# Altium PCB ACH512识别升级仪V1.2_20260608.PcbDoc (part 1 of 6)
Units mil, origin at the board's own origin, x right, y up, seen from the top; angles counter-clockwise.
Board outline 6141.73 x 5401.57 mil, 2 copper layers (Top Layer, Bottom Layer); 157 components, 111 nets, 548 pads, 222 vias.
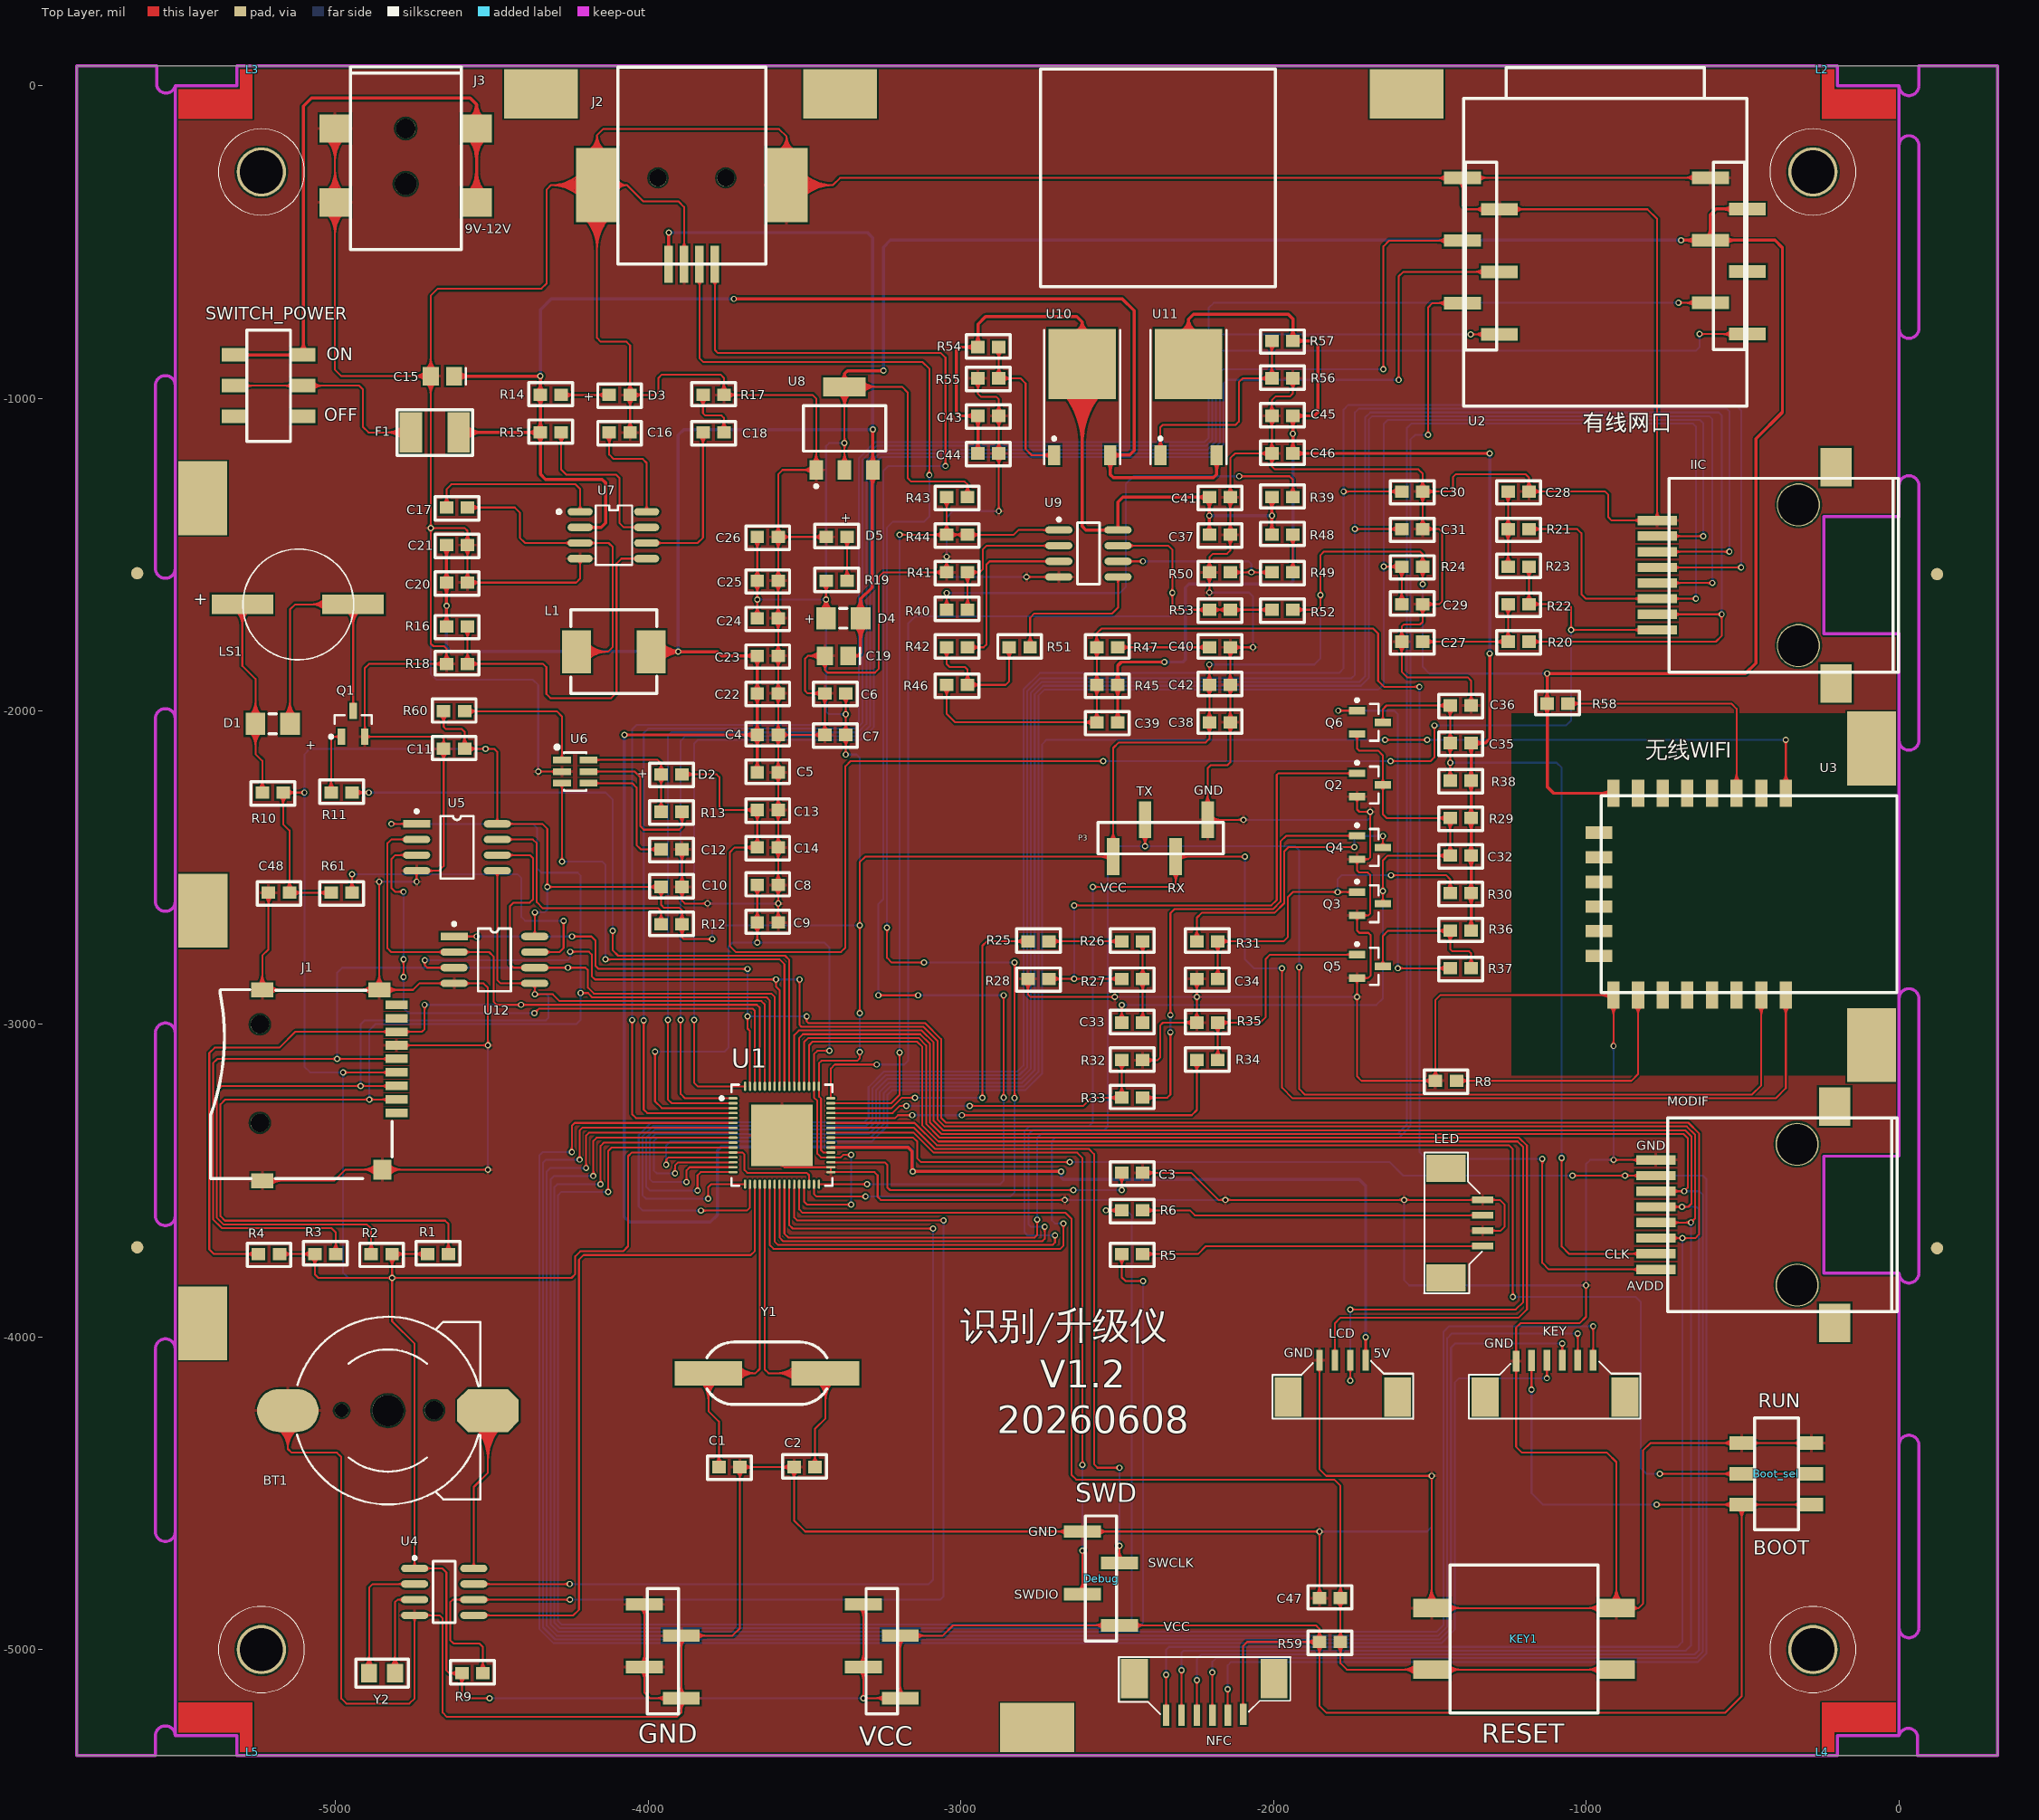
[diagram p0: Top Layer view]
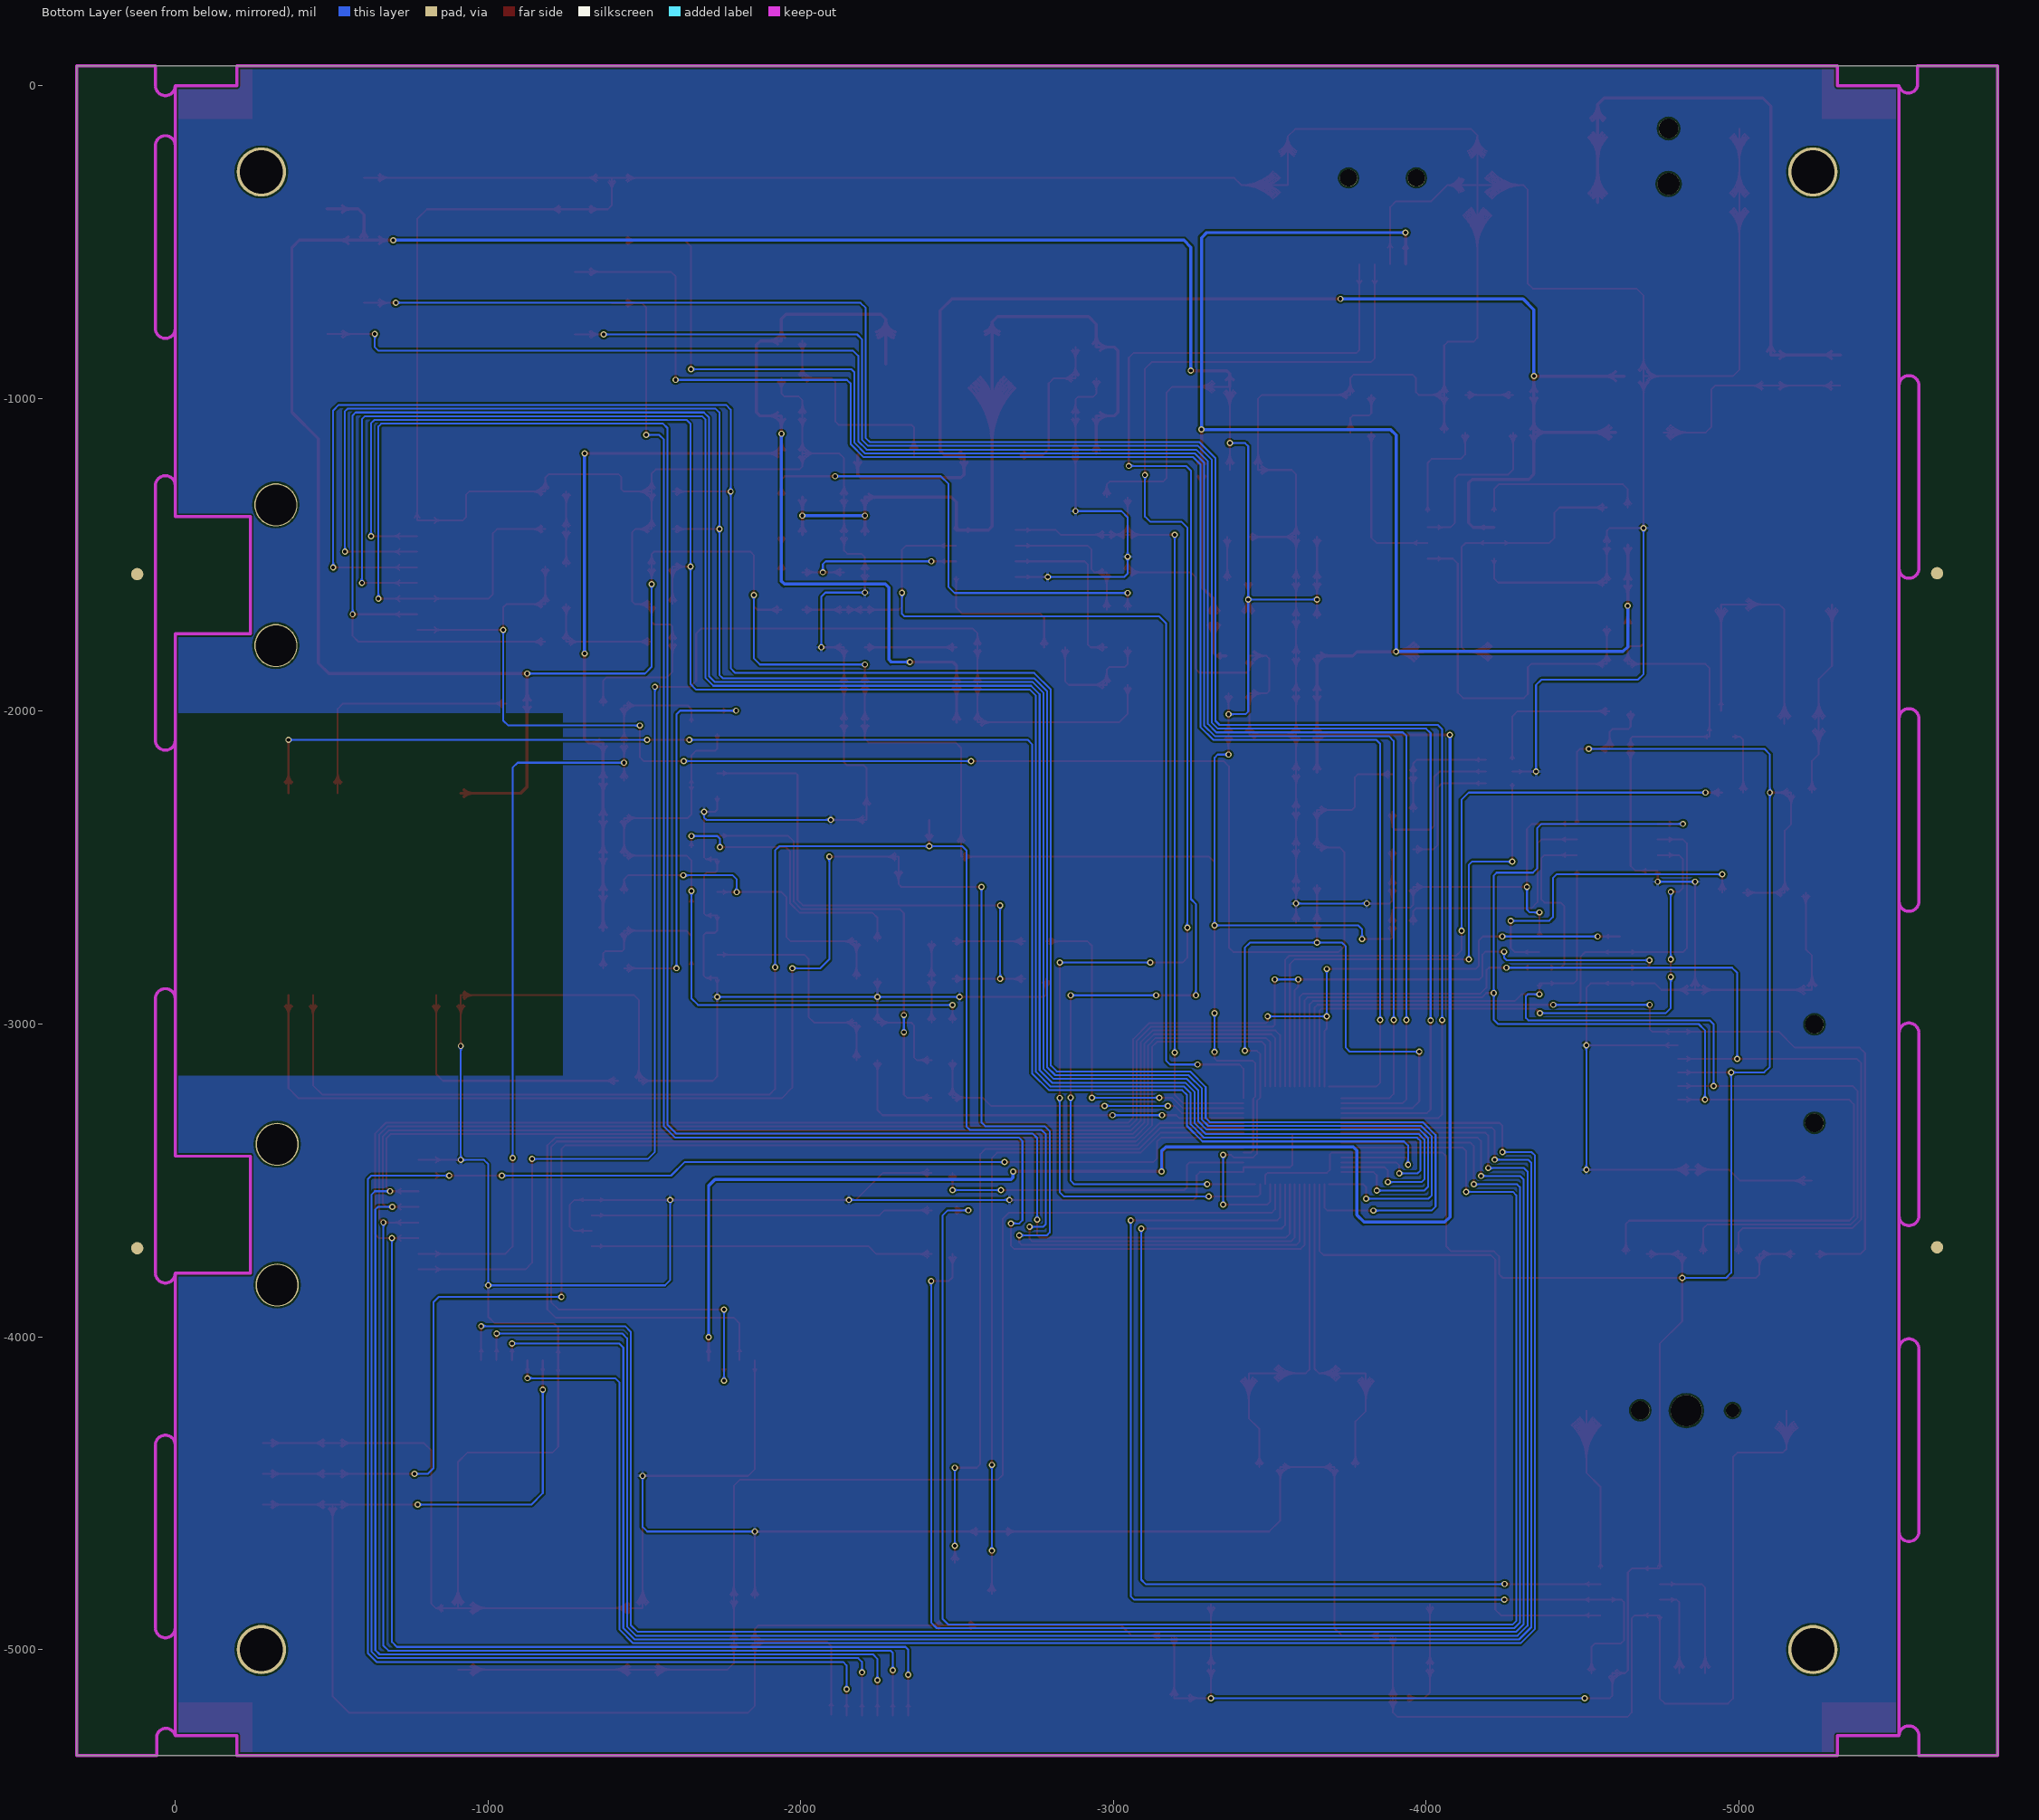
[diagram p1: Bottom Layer view, seen from below]

## Layer stack, top to bottom
Top Layer: signal copper 1.4
Dielectric: dielectric 12.6, FR-4, Dk 4.8
Bottom Layer: signal copper 1.4

## Board outline
-5826.77,62.99 -5826.77,-5338.58 314.96,-5338.58 314.96,62.99 -5826.77,62.99

## Design rules (kind name [scope] priority, off if disabled: settings)
Clearance [All] p1: gap=6
HoleSize [All] p1: absolutevalues=TRUE maxlimit=1000 minlimit=1 maxpercent=80.000 minpercent=20.000
MinimumSolderMaskSliver [All] p1: minsoldermaskwidth=0
PolygonConnect [All] p1: connectstyle=Relief reliefconductorwidth=10 reliefentries=4 polygonreliefangle="90 Angle"
RoutingVias [All] p1: holewidth=11.81 width=19.68 viastyle="Through Hole" minholewidth=11.81 minwidth=19.68 maxholewidth=19.68 maxwidth=31.5
SilkToSilkClearance [All] p1: silktosilkclearance=0
SilkscreenOverComponentPads [All] p1: minsilkscreentomaskgap=0
SolderMaskExpansion [All] p1: expansion=4
Width [All] p1: maxlimit=10 minlimit=6 preferedwidth=6 minimp=50.000000 maximp=50.000000 favimp=50.000000
24 further rules are at their usual default settings.

## Components (designator, comment, footprint, x,y, rotation, side; value= is the part's Value field where it differs from the comment)
Boot_sel "Header 3" 拨码开关 -280.81,-4536.59 r90 top
BT1 "Battery" BAT600 -4511.81,-4235.59 r90 top
C1 "Cap Semi" 0603 -3739.81,-4416.59 r0 top
C2 "Cap Semi" 0603 -3499.81,-4416.59 r180 top
C3 "Cap Semi" 0603 -2451.81,-3475.59 r0 top
C4 "Cap" 0603 -3617.28,-2075.59 r180 top
C5 "Cap" 0603 -3617.28,-2195.59 r180 top
C6 "Cap" 0603 -3401.21,-1942.59 r0 top
C7 "Cap" 0603 -3401.21,-2075.59 r0 top
C8 "Cap" 0603 -3617.28,-2555.59 r180 top
C9 "Cap" 0603 -3617.28,-2675.59 r180 top
C10 "Cap Semi" 0603 -3924.81,-2561.59 r180 top
C11 "Cap" 0603 -4620,-2120 r180 top
C12 "Cap" 0603 -3924.81,-2441.59 r0 top
C13 "Cap" 0603 -3617.28,-2315.59 r0 top
C14 "Cap" 0603 -3617.28,-2435.59 r0 top
C15 "Cap Semi" 0805 -4657.41,-928.59 r180 top
C16 "Cap Semi" 0603 -4090.81,-1108.59 r0 top
C17 "Cap Semi" 0603 -4610.81,-1348.59 r0 top
C18 "Cap Semi" 0603 -3790.81,-1108.59 r0 top
C19 "22uF" 0805 -3397.27,-1822.59 r180 top
C20 "100nF" 0603 -4610.81,-1588.59 r0 top
C21 "100nF" 0603 -4610.81,-1468.59 r0 top
C22 "100nF" 0603 -3617.27,-1942.59 r0 top
C23 "100nF" 0603 -3617.27,-1822.59 r0 top
C24 "Cap Pol1" 0603 -3617.27,-1702.59 r0 top
C25 "Cap Pol1" 0603 -3617.27,-1582.59 r0 top
C26 "Cap Semi" 0603 -3617.27,-1442.59 r0 top
C27 "Cap Semi" 0603 -1556.81,-1777.59 r0 top
C28 "Cap Semi" 0603 -1216.81,-1297.59 r0 top
C29 "Cap Semi" 0603 -1556.81,-1657.59 r180 top
C30 "Cap Semi" 0603 -1556.81,-1297.59 r0 top
C31 "Cap Semi" 0603 -1556.81,-1417.59 r0 top
C32 "Cap Semi" 0603 -1401.81,-2461.59 r0 top
C33 "Cap Semi" 0603 -2451.81,-2995.59 r180 top
C34 "Cap Semi" 0603 -2211.81,-2855.59 r0 top
C35 "Cap Semi" 0603 -1401.81,-2101.59 r0 top
C36 "Cap Semi" 0603 -1401.81,-1981.59 r0 top
C37 "Cap Semi" 0603 -2171.81,-1435.59 r0 top
C38 "Cap Semi" 0603 -2171.81,-2035.59 r180 top
C39 "Cap Semi" 0603 -2531.81,-2035.59 r0 top
C40 "Cap Semi" 0603 -2171.81,-1795.59 r180 top
C41 "Cap Semi" 0603 -2171.81,-1315.59 r0 top
C42 "Cap Semi" 0603 -2171.81,-1915.59 r180 top
C43 "Cap Semi" 0603 -2911.81,-1055.59 r0 top
C44 "Cap Semi" 0603 -2911.81,-1175.59 r0 top
C45 "Cap Semi" 0603 -1971.81,-1055.59 r180 top
C46 "Cap Semi" 0603 -1971.81,-1175.59 r180 top
C47 "Cap Semi" 0603 -1819.81,-4835.59 r180 top
C48 "Cap Semi" 0603 -5180,-2580 r0 top
D1 "1N4148" 3216[1206] -5200,-2040 r180 top
D2 "LRB521S 30TIG" 0603 -3924.81,-2201.59 r0 top
D3 "LED" 0603 -4090.81,-988.59 r0 top
D4 "1N4148" 3216[1206] -3375.62,-1702.59 r0 top
D5 "LED" 0603 -3397.27,-1442.59 r180 top
Debug "Header 7" 4PIN_贴片 -2492.81,-4922.72 r90 top
F1 "可恢复保险丝" FUSE_1812 -4681.81,-1108.59 r0 top
GND "" 4Pin_贴片#1 -4011.81,-4855.59 r270 top
IIC "" RJ45网络插座 -411.81,-1520 r0 top
J1 "Micro SD" MICRO_SD -5084.74,-3192.59 r270 top
J2 "USB" USB_B_型贴片 -3860,-255.59 r270 top
J3 "DC050" DC050_贴片 -4951.81,60 r270 top
KEY "Header 6" 6pin__1.25mm -1161.81,-4445.59 r180 top
KEY1 "SW-PB按键" 12*12_贴片按钮 -1199.24,-4966.02 r180 top
L1 "Inductor" SMTDR75-100M -4110.81,-1811.02 r0 top
L2 "L1" 边框焊锡 -247,52 r180 top
L3 "L1" 边框焊锡2 -5264.81,52 r180 top
L4 "L1" 边框焊锡2 -247,-5327.28 r0 top (schematic designator L3)
L5 "L1" 边框焊锡 -5264.81,-5327.59 r0 top (schematic designator L2)
LCD "Header 4" 4pin_1.25mm -1600,-4055.59 r180 top (schematic designator UARTB_LCD1)
LED "Header 4" 4pin_1.25mm -1311.81,-3815.59 r90 top
LS1 "Speaker" 贴片蜂鸣器 -5120,-1660 r180 top
MODIF "" RJ45网络插座 -416,-3564.59 r0 top
NFC "Header 6" 6pin__1.25mm -2160,-4840 r0 top
P3 "UART" 4Pin_贴片#2 -2160.81,-2456 r90 top
Q1 "2N3904" SOT23_N -4942.83,-2040 r90 top
Q2 "MMBT3904" SOT23_N -1691.81,-2235.59 r0 top
Q3 "MMT3906" SOT23_N -1691.81,-2615.59 r0 top
Q4 "MOSFET-N" SOT23_N -1691.81,-2435.59 r0 top
Q5 "MMBT3904" SOT23_N -1691.81,-2815.59 r0 top
Q6 "MOSFET-N" SOT23_N -1691.81,-2035.59 r0 top
R1 "Res3" 0603 -4671.81,-3735.59 r180 top
R2 "Res3" 0603 -4851.81,-3735.59 r0 top
R3 "Res3" 0603 -5031.81,-3735.59 r180 top
R4 "Res3" 0603 -5211.81,-3735.59 r0 top
R5 "Res3" 0603 -2451.81,-3735.59 r0 top
R6 "Res3" 0603 -2451.81,-3595.59 r0 top
R8 "Res1" 0603 -1448.81,-3181.59 r0 top
R9 "Res1" 0603 -4561.81,-5075.59 r180 top
R10 "Res1" 0603 -5200,-2260 r0 top
R11 "Res1" 0603 -4980,-2260 r180 top
R12 "Res1" 0603 -3924.81,-2681.59 r180 top
R13 "Res3" 0603 -3924.81,-2321.59 r0 top
R14 "Res1" 0603 -4310.81,-988.59 r180 top
R15 "Res1" 0603 -4310.81,-1108.59 r180 top
R16 "Res1" 0603 -4610.81,-1728.59 r0 top
R17 "Res1" 0603 -3790.81,-988.59 r180 top
R18 "Res1" 0603 -4610.81,-1848.59 r180 top
R19 "Res1" 0603 -3397.27,-1582.59 r180 top
R20 "Res1" 0603 -1216.81,-1777.59 r0 top
R21 "Res1" 0603 -1216.81,-1417.59 r0 top
R22 "Res1" 0603 -1216.81,-1657.59 r0 top
R23 "Res1" 0603 -1216.81,-1537.59 r180 top
R24 "Res1" 0603 -1556.81,-1537.59 r0 top
R25 "Res3" 0603 -2751.81,-2735.59 r180 top
R26 "Res3" 0603 -2451.81,-2735.59 r180 top
R27 "Res3" 0603 -2451.81,-2855.59 r0 top
R28 "Res3" 0603 -2751.81,-2855.59 r0 top
R29 "Res3" 0603 -1401.81,-2341.59 r0 top
R30 "Res3" 0603 -1401.81,-2581.59 r0 top
R31 "Res3" 0603 -2211.81,-2735.59 r180 top
R32 "Res3" 0603 -2451.81,-3115.59 r180 top
R33 "Res3" 0603 -2451.81,-3235.59 r180 top
R34 "Res3" 0603 -2211.81,-3115.59 r180 top
R35 "Res3" 0603 -2211.81,-2995.59 r180 top
R36 "Res3" 0603 -1401.81,-2701.59 r180 top
R37 "Res3" 0603 -1401.81,-2821.59 r0 top
R38 "Res3" 0603 -1401.81,-2221.59 r0 top
R39 "Res3" 0603 -1971.81,-1315.59 r180 top
R40 "Res3" 0603 -3011.81,-1675.59 r180 top
R41 "Res3" 0603 -3011.81,-1555.59 r0 top
R42 "Res3" 0603 -3011.81,-1795.59 r180 top
R43 "Res3" 0603 -3011.81,-1315.59 r0 top
R44 "Res3" 0603 -3011.81,-1435.59 r0 top
R45 "Res3" 0603 -2531.81,-1915.59 r0 top
R46 "Res3" 0603 -3011.81,-1915.59 r0 top
R47 "Res3" 0603 -2531.81,-1795.59 r180 top
R48 "Res3" 0603 -1971.81,-1435.59 r180 top
R49 "Res3" 0603 -1971.81,-1555.59 r0 top
R50 "Res3" 0603 -2171.81,-1555.59 r0 top
R51 "Res3" 0603 -2811.81,-1795.59 r180 top
R52 "Res3" 0603 -1971.81,-1675.59 r0 top
R53 "Res3" 0603 -2171.81,-1675.59 r0 top
R54 "" 0603 -2911.81,-835.59 r180 top
R55 "" 0603 -2911.81,-935.59 r0 top
R56 "" 0603 -1971.81,-935.59 r180 top
R57 "" 0603 -1971.81,-815.59 r0 top
R58 "Res1" 0603 -1091.81,-1975.59 r180 top
R59 "Res3" 0603 -1819.81,-4975.59 r0 top
R60 "Res3" 0603 -4620,-2000 r180 top
R61 "Res1" 0603 -4980,-2580 r0 top
SWITCH_POWER "Header 3" 拨码开关 -5101.81,-1057.59 r90 top
U1 "ACH512-QFN64" QFN64 -3571.81,-3355.59 r0 top
U2 "W5500以太网网络模块" W5500以太网网络模块 -1391.81,-40 r0 top
U3 "ESP8266串口WIFI模块" ESP8266串口WIFI模块 -951.81,-2900 r270 top
U4 "DS1302" M08A_N -4651.81,-4815.59 r0 top
U5 "硬件SPI_Flash模块1" W25Q128FV_SOIC8_208mil_S -4740,-2360 r0 top
U6 "TPS22810DBV" SOT23-6 -4232.81,-2192.91 r270 top
U7 "MP2303" MP1482-SOIC8 -4110.81,-1437.01 r270 top
U8 "REG1117-3.3" ZZ311 -3371.81,-1095.59 r0 top
U9 "LM393M" M08A_N -2591.81,-1495.59 r0 top
U10 "LM317MDT1" 369A-13 -2611.81,-1035.59 r0 top
U11 "LM317MDT" 369A-13 -2271.81,-1035.59 r0 top
U12 "硬件SPI_Flash模块2" W25Q128FV_SOIC8_208mil_S -4620,-2720 r0 top
VCC "" 4Pin_贴片#1 -3311.81,-4855.59 r270 top
Y1 "12M" SM-49 -3619.81,-4116.59 r0 top
Y2 "XTAL" 32K贴片晶振 -4891.81,-5075.59 r180 top

## Footprints (in the part's own frame and the unit in brackets; to place one, negate y for a bottom-side part, rotate by r counter-clockwise, add the part's x,y. Pads: shape width x height; smd on the part's side, far side on the other; paste and mask are expansions set on the pad)
4pin_1.25mm [mm]
  rect 2.2x3.2 smd: 0(0.091,3.486) 0(8.981,3.486)
  rect 0.54x1.7 smd: 1(2.68,0.502) 2(3.931,0.502) 3(5.182,0.502) 4(6.433,0.502)
  silkscreen extent -1.16,0.54 10.26,5.26
4PIN_贴片 [mm]
  rect 1.02x3 smd: 1(0,0) 2(2.54,3) 3(5.08,0) 4(7.62,3)
  silkscreen extent -1.27,0.23 8.89,2.77
4Pin_贴片#1 [mm]
  rect 1.02x3 smd: 1(0,0) 2(2.54,3) 3(5.08,0) 4(7.62,3)
  silkscreen extent -1.27,0.23 8.89,2.77
4Pin_贴片#2 [mm]
  rect 3x1.02 smd: 1(-0.229,8.941) 2(2.769,6.35) 3(-0.229,3.861) 4(2.769,1.27)
  silkscreen extent 0,0 2.54,10.16
6pin__1.25mm [mm]
  rect 2.2x3.2 smd: 0(-7.25,-6.42) 0(4.1,-6.42)
  rect 0.54x1.7 smd: 1(-4.661,-9.404) 2(-3.41,-9.404) 3(-2.159,-9.404) 4(-0.908,-9.404) 5(0.342,-9.398) 6(1.592,-9.328)
  silkscreen extent -8.5,-9.32 5.43,-4.68
12*12_贴片按钮 [mm]
  rect 3x1.5 smd: 1(-7.5,2.5) 1(7.5,2.5) 2(-7.5,-2.5) 2(7.5,-2.5)
  silkscreen extent -6,-6 6,6
32K贴片晶振 [mm]
  rect 1.3x1.5 smd: 1(-2.1,0) 2(0,0)
  silkscreen extent -3.18,-1.14 1.08,1.14
369A-13 [mm]
  rect 1x1.6 smd: 1(-2.285,-3.7) 3(2.285,-3.7)
  rect 5.5x5.7 smd: 4(0,3.7)
  silkscreen extent -3.09,-4.4 3.09,6.45
0603 [mm] "Chip Capacitor; Body 1.6 x 0.8 mm (LxW typ)"
  rect 1.1x1 smd: 1(-0.85,0) 2(0.85,0)
  silkscreen extent -1.78,-1.02 1.78,0.89
0805 [mm] "Chip Capacitor; Body 2.0 x 1.2 mm (LxW typ)"
  rect 1.3x1.5 smd: 1(-0.95,0) 2(0.95,0)
  silkscreen extent -1.9,-0.65 -1.9,0.65
3216[1206] [mm] "Chip Resistor; Body 3.2 x 1.6 mm (LxW typ)"
  rect 1.6x1.8 smd: 1(-1.4,0) 2(1.4,0)
  silkscreen extent -0.3,-0.8 0.3,0.8
BAT600 [mm]
  round 1.1 hole 1.1: 0(-0.01,11.88)
  round 2.54 hole 2.54: 0(-0.01,8.13)
  round 1.5 hole 1.5: 0(0.015,4.38)
  oct 3.5x5 smd: 1(-0.01,0.002)
  oval 3.5x5 smd: 2(-0.01,16.258)
  silkscreen extent -7.63,0.63 7.61,15.49
DC050_贴片 [mm]
  rect 2.3x2.5 smd: 2(5,10.25) 3(11,10.25) 4(5,-1.25) 4(11,-1.25)
  round 1.6 hole 1.6: None(5,4.5)
  round 1.8 hole 1.8: None(9.5,4.5)
  silkscreen extent 0,0 14.83,9
ESP8266串口WIFI模块 [mm]
  rect 2.2x1 smd: 1(-16.2,14.98) 2(-16.2,12.98) 3(-16.2,10.98) 4(-16.2,8.98) 5(-16.2,6.98) 6(-16.2,4.98) 7(-16.2,2.98) 8(-16.2,0.98) 15(0.2,0.98) 16(0.2,2.98) 17(0.2,4.98) 18(0.2,6.98) 19(0.2,8.98) 20(0.2,10.98) 21(0.2,12.98) 22(0.2,14.98)
  rect 1x2.2 smd: 9(-13,-0.2) 10(-11,-0.2) 11(-9,-0.2) 12(-7,-0.2) 13(-5,-0.2) 14(-3,-0.2)
  silkscreen extent -16,0 0,24
FUSE_1812 [mil] "FUSE_1812"
  rect 72x128 smd: 1(-76,0) 2(76,0)
  silkscreen extent -121,-73 121,73
M08A_N [mm] "SOIC, 8-Leads, Body 4.9x3.9mm, Pitch 1.27mm, IPC Medium Density"
  oval 2.2x0.6 smd: 1(-2.4,1.905) 2(-2.4,0.635) 3(-2.4,-0.635) 4(-2.4,-1.905) 5(2.4,-1.905) 6(2.4,-0.635) 7(2.4,0.635) 8(2.4,1.905)
  silkscreen extent -2.52,-2.5 0.9,2.88, body extent -2,-2.5 2,2.5, height 1.75
MICRO_SD [mil] "MICRO_SD"
  round 59.06 hole 59.06 unplated mask+0: 0(-191.46,-156.51) 0(123.5,-156.51)
  rect 27.56x70.87 smd: 1(92,280.5) 2(48.69,280.5) 3(5.39,280.5) 4(-37.92,280.5) 5(-81.23,280.5) 6(-124.54,280.5) 7(-167.84,280.5) 8(-211.15,280.5) 9(-254.46,280.5)
  rect 62.99x59.06 smd: 10(273.1,235.22)
  rect 47.24x70.87 smd: 11(-301.7,225.38) 12(-301.7,-148.63) 13(308.54,-148.63)
  silkscreen extent -302,-314 302,344
MP1482-SOIC8 [mil] "MP1482-SOIC8"
  oval 24x80 smd: 1(-75,-106.3) 2(-25,-106.3) 3(25,-106.3) 4(75,-106.3) 5(75,106.3) 6(25,106.3) 7(-25,106.3) 8(-75,106.3)
  silkscreen extent -95,-180 95,60
QFN64 [mm] "ACH512"
  rect 5x5 smd: 0(0,0)
  oval 0.75x0.2 smd: 1(-3.975,3) 2(-3.975,2.6) 3(-3.975,2.2) 4(-3.975,1.8) 5(-3.975,1.4) 6(-3.975,1) 7(-3.975,0.6) 8(-3.975,0.2) 9(-3.975,-0.2) 10(-3.975,-0.6) 11(-3.975,-1) 12(-3.975,-1.4) 13(-3.975,-1.8) 14(-3.975,-2.2) 15(-3.975,-2.6) 16(-3.975,-3) 33(3.975,-3) 34(3.975,-2.6) 35(3.975,-2.2) 36(3.975,-1.8) 37(3.975,-1.4) 38(3.975,-1) 39(3.975,-0.6) 40(3.975,-0.2) 41(3.975,0.2) 42(3.975,0.6) 43(3.975,1) 44(3.975,1.4) 45(3.975,1.8) 46(3.975,2.2) 47(3.975,2.6) 48(3.975,3)
  oval 0.2x0.75 smd: 17(-3,-3.975) 18(-2.6,-3.975) 19(-2.2,-3.975) 20(-1.8,-3.975) 21(-1.4,-3.975) 22(-1,-3.975) 23(-0.6,-3.975) 24(-0.2,-3.975) 25(0.2,-3.975) 26(0.6,-3.975) 27(1,-3.975) 28(1.4,-3.975) 29(1.8,-3.975) 30(2.2,-3.975) 31(2.6,-3.975) 32(3,-3.975) 49(3,3.975) 50(2.6,3.975) 51(2.2,3.975) 52(1.8,3.975) 53(1.4,3.975) 54(1,3.975) 55(0.6,3.975) 56(0.2,3.975) 57(-0.2,3.975) 58(-0.6,3.975) 59(-1,3.975) 60(-1.4,3.975) 61(-1.8,3.975) 62(-2.2,3.975) 63(-2.6,3.975) 64(-3,3.975)
  silkscreen extent -5.02,-4.1 4.1,4.1, body extent -4.05,-4.05 4.05,4.05, height 0.8
RJ45网络插座 [mm]
  round 3.5 hole 3.3: 0(2.286,-6.858) 0(2.286,4.572)
  rect 2.54x3.12 smd: 0(5.336,-9.928) 0(5.336,7.642)
  rect 3.18x0.76 smd: 1(-9.184,-5.588) 2(-9.184,-4.318) 3(-9.184,-3.048) 4(-9.184,-1.778) 5(-9.184,-0.508) 6(-9.184,0.762) 7(-9.184,2.032) 8(-9.184,3.302)
  silkscreen extent -8.23,-9.01 10.42,6.73
SM-49 [mm]
  rect 5.5x2 smd: 1(-4.75,0) 2(4.75,0)
  silkscreen extent -4.87,-2.54 4.87,2.54
SMTDR75-100M [mil] "SMTDR75-100M"
  rect 92.5x137.8 smd: 1(-117.59,1.5) 2(120.59,1.5)
  silkscreen extent -136,-132 139,135
SOT23-6 [mm] "SOT-23/SC-74A; 5 Leads; Body 3.1 x 3 mm, inc. leads (LxW max)"
  rect 0.55x1.45 smd: 1(-0.95,-1.075) 2(0,-1.075) 3(0.95,-1.075) 4(0.95,1.075) 5(0,1.075) 6(-0.95,1.075)
  silkscreen extent -2.13,-1.62 1.55,0.9
SOT23_N [mm] "SOT23, 3-Leads, Body 2.9x1.3mm, Pitch 0.95mm, Lead Span 2.3mm, IPC Medium Density"
  rect 1.3x0.6 smd: 1(-1.05,0.95) 2(-1.05,-0.95) 3(1.05,0)
  silkscreen extent -1.17,-1.5 0.7,1.92, body extent -0.7,-1.5 0.7,1.5, height 1.1
USB_B_型贴片 [mm]
  rect 3x0.7 smd: 1(8,-1.875) 2(8,0.625) 3(8,1.875) 4(8,-0.625)
  rect 6.04x3.4 smd: 5(1.58,7.7) 6(1.58,-7.7)
  round 1.4 hole 1.4: None(1,2.75) None(1,-2.75)
  silkscreen extent -8,-6 8,6
W25Q128FV_SOIC8_208mil_S [mm]
  rect 2.2x0.6 smd: 1(0,0)
  oval 2.2x0.6 smd: 2(0,-1.27) 3(0,-2.54) 4(0,-3.81) 5(6.55,-3.81) 6(6.55,-2.54) 7(6.55,-1.27) 8(6.55,0)
  silkscreen extent -0.13,-4.44 4.61,1.14
W5500以太网网络模块 [mm]
  rect 3x1.02 smd: 1(-0.106,-6.477) 2(2.894,-9.017) 3(-0.106,-11.557) 4(2.894,-14.097) 5(-0.106,-16.637) 6(2.894,-19.177) 7(20.027,-6.452) 8(23.027,-8.992) 9(20.027,-11.532) 10(23.027,-14.072) 11(20.027,-16.612) 12(23.027,-19.152)
  silkscreen extent 0,-25 23,2.5
ZZ311 [mm] "SOT-223/SC-73; 4 Leads; Body 6.7 x 7.3 mm, inc. leads (LxW max)"
  rect 1.1x1.55 smd: 1(-2.3,-3.375) 2(0,-3.375) 3(2.3,-3.375)
  rect 3.45x1.55 smd: 4(0,3.375)
  silkscreen extent -3.35,-4.82 3.35,1.85
拨码开关 [mm]
  rect 1.1x1.95 smd: 1(0,5.65) 1(0,0) 2(2.5,5.65) 2(2.5,0) 3(5,0) 3(5,5.65)
  silkscreen extent -2.02,1.05 7.02,4.6
贴片蜂鸣器 [mm]
  rect 5x1.6 smd: 1(-4.5,-0.041) 2(4.5,-0.041)
  silkscreen extent -4.55,-4.54 4.45,4.46
边框焊锡 [mil]
  Top Layer region: -236.22,62.99 -236.22,157.48 0,157.48 0,0 -39.37,0 -39.37,62.99
边框焊锡2 [mil]
  Top Layer region: 0,0 0,157.48 236.22,157.48 236.22,62.99 39.37,62.99 39.37,0

## Part data
Boot_sel SWITCH_POWER: "Header, 3-Pin"
BT1: "Multicell Battery"
C1 C2 C3 C10 C15 C16 C17 C18 C26 C27 C28 C29 C30 C31 C32 C33 C34 C35 C36 C37 C38 C39 C40 C41 C42 C43 C44 C45 C46 C47 C48: "Capacitor (Semiconductor SIM Model)"
C4 C5 C6 C7 C8 C9 C11 C12 C13 C14: "Capacitor"
C19 C20 C21 C22 C23: library part "Cap Semi", "Capacitor (Semiconductor SIM Model)"
C24 C25: "Polarized Capacitor (Radial)"
D1: library part "Diode 1N4148", "High Conductance Fast Diode"
D2: library part Diode, "Default Diode"
D3 D5: library part LED1, "Typical RED GaAs LED"
D4: "High Conductance Fast Diode"
Debug GND P3 VCC: library part "Header 4", "Header, 4-Pin"
F1: library part "Diode 1N4007", "1 Amp General Purpose Rectifier"
IIC MODIF: library part "Header 8", "Header, 8-Pin"
J1: library part MicroSD
KEY NFC: "Header, 6-Pin"
L2 L3 L4 L5: library part LCD_JC018
LCD LED: "Header, 4-Pin"
LS1: "Loudspeaker"
Q1: "NPN General Purpose Amplifier"
Q2 Q5: "NPN Switching Transistor"
Q3: library part 9012
Q4 Q6: "N-Channel MOSFET"
R1 R2 R3 R4 R5 R6 R8 R9 R10 R11 R12 R13 R14 R15 R16 R17 R18 R19 R20 R21 R22 R23 R24 R25 R26 R27 R28 R29 R30 R31 R32 R33 R34 R35 R36 R37 R38 R39 R40 R41 R42 R43 R44 R45 R46 R47 R48 R49 R50 R51 R52 R53 R58 R59 R60 R61: "Resistor"
R54 R55 R56 R57: library part Res3, "Resistor"
U1: library part Component_1
U2: library part Component_7
U3: library part Component_6
U5 U12: library part W25QXX, "SPI FLASH"
U6: library part Component_2
U8: "800mA and 1A Low Dropout Positive Regulator 2.85V, 3.3V, 5V, and Adjustable"
U9: "Low-Power Low Offset Voltage Dual Comparator"
U10: library part LM317MDT, "Three-Terminal Adjustable Output Positive Voltage Regulator"
U11: "Three-Terminal Adjustable Output Positive Voltage Regulator"
Y1: library part XTAL, "Crystal Oscillator"
Y2: "Crystal Oscillator"

## Free pads (board coordinates)
  round 39.37 smd mask+19.68: 0(-5633.22,-3713.83) 0(-5633.22,-1558.83) 0(121.41,-3716.76) 0(121.41,-1561.76)
  round 39.37 smd far side mask+19.68: 0(-5633.22,-3713.83) 0(-5633.22,-1558.83) 0(121.41,-3716.76) 0(121.41,-1561.76)
  rect 157.48x236.22 smd: 0(-5423.81,-3956.69) 0(-5423.81,-1318.9) 0(-5422.81,-2637.79) 0(-88,-3067.01) 0(-88,-2119.01)
  rect 236.22x157.48 smd: 0(-4342.52,-25.59) 0(-3385.83,-25.59) 0(-2755.91,-5249.58) 0(-1574.8,-25.59)
  round 157.48 hole 137.8: 1(-5236.22,-275.59) 1(-275.59,-5000) 1(-275.59,-275.59) 2(-5236.22,-5000)

## Via types
v1: diameter 19.68, hole 11.81, Top Layer to Bottom Layer, 222 vias

## Nets (pads, with @x,y where several pads share a name; then routed paths per layer and width w, separated by ;. In a path a pad name is that pad's centre, name@x,y a point inside that pad or via, vN(x,y) a via of type N, cw(c..) or ccw(c..) an arc to the next point about the centre after c; other vN are vias at no path point)
5V: C4.2 C5.2 C19.1 C20.1 C21.1 C22.1 C23.1 D4.2 J2.1 L1.2 LCD.1 R16.1 U1.38 U8.3 | length 12791.9
  Top Layer w10: R16.1@-4654.66,-1718.21 ccw(c-4679.73,-1693.14) -4644.27,-1693.14 ccw(c-4608.82,-1693.14) R16.1@-4633.89,-1718.21 ; C20.1@-4654.66,-1598.97 cw(c-4679.73,-1624.04) -4644.27,-1624.04 cw(c-4608.82,-1624.04) C20.1@-4633.89,-1598.97 ; C20.1@-4654.66,-1578.21 ccw(c-4679.73,-1553.14) -4644.27,-1553.14 ccw(c-4608.82,-1553.14) C20.1@-4633.89,-1578.21 ; C21.1@-4654.66,-1478.97 cw(c-4679.73,-1504.04) -4644.27,-1504.04 cw(c-4608.82,-1504.04) C21.1@-4633.89,-1478.97 ; v1@-4647.7,-1666.01 cw(c-4655.97,-1674.28) -4644.27,-1674.28 cw(c-4632.58,-1674.28) v1@-4640.85,-1666.01 ; v1@-4647.7,-1659.17 ccw(c-4655.97,-1650.9) -4644.27,-1650.9 ccw(c-4632.58,-1650.9) v1@-4640.85,-1659.17 ; R16.1@-4644.27,-1728.59 v1(-4644.27,-1662.59) C20.1@-4644.27,-1588.59 C21.1@-4644.27,-1468.59 ; v1(-4075.81,-2075.59) C4.2@-3650.74,-2075.59 ; v1@-4072.39,-2079.01 cw(c-4064.12,-2087.28) -4064.12,-2075.59 cw(c-4064.12,-2063.9) v1@-4072.39,-2072.17 ; L1.2@-3990.22,-1809.52 -3778.07,-1809.52 -3765,-1822.59 C23.1@-3650.74,-1822.59 C22.1@-3650.74,-1942.59 C5.2@-3650.74,-2195.59 ; L1.2@-3975.19,-1824.55 cw(c-3938.92,-1860.83) -3938.92,-1809.52 cw(c-3938.92,-1758.22) L1.2@-3975.19,-1794.5 ; L1.2@-3968.12,-1831.62 cw(c-3914.78,-1884.97) -3914.78,-1809.52 cw(c-3914.78,-1734.08) L1.2@-3968.12,-1787.43 ; L1.2@-3961.05,-1838.69 cw(c-3890.63,-1909.11) -3890.63,-1809.52 cw(c-3890.63,-1709.94) L1.2@-3961.05,-1780.36 ; J2.1@-3940.03,-519.07 ccw(c-3955.01,-504.08) -3933.82,-504.08 ccw(c-3912.62,-504.08) J2.1@-3927.61,-519.07 ; v1@-3937.24,-473.01 cw(c-3945.51,-481.27) -3933.82,-481.27 cw(c-3922.13,-481.27) v1@-3930.39,-473.01 ; J2.1@-3933.82,-570.55 v1(-3933.82,-469.58) ; -3916.76,-1809.52 ccw(c-3916.76,-1796.05) v1@-3907.23,-1805.58 ; -3914.24,-1809.52 cw(c-3914.24,-1819.43) v1@-3907.23,-1812.42 ; v1@-3900.39,-1812.42 cw(c-3893.38,-1819.43) -3893.38,-1809.52 ; v1@-3900.39,-1805.58 ccw(c-3890.86,-1796.05) -3890.86,-1809.52 ; C4.2@-3663.09,-2085.97 ccw(c-3688.16,-2111.04) -3688.16,-2075.59 ccw(c-3688.16,-2040.14) C4.2@-3663.09,-2065.21 ; C23.1@-3663.09,-1832.97 ccw(c-3688.16,-1858.04) -3688.16,-1822.59 ccw(c-3688.16,-1787.14) C23.1@-3663.09,-1812.21 ; C5.2@-3661.12,-2185.21 ccw(c-3686.19,-2160.14) -3650.74,-2160.14 ccw(c-3615.29,-2160.14) C5.2@-3640.36,-2185.21 ; C4.2@-3661.12,-2085.97 cw(c-3686.19,-2111.04) -3650.74,-2111.04 cw(c-3615.29,-2111.04) C4.2@-3640.36,-2085.97 ; C4.2@-3661.12,-2065.21 ccw(c-3686.19,-2040.14) -3650.74,-2040.14 ccw(c-3615.29,-2040.14) C4.2@-3640.36,-2065.21 ; C22.1@-3661.12,-1952.97 cw(c-3686.19,-1978.04) -3650.74,-1978.04 cw(c-3615.29,-1978.04) C22.1@-3640.36,-1952.97 ; C22.1@-3661.12,-1932.21 ccw(c-3686.19,-1907.14) -3650.74,-1907.14 ccw(c-3615.29,-1907.14) C22.1@-3640.36,-1932.21 ; C23.1@-3661.12,-1832.97 cw(c-3686.19,-1858.04) -3650.74,-1858.04 cw(c-3615.29,-1858.04) C23.1@-3640.36,-1832.97 ; U1.38@-3415.31,-3394.96 -3168.04,-3394.96 -3155.72,-3407.28 -3155.72,-3469.59 v1(-3153.72,-3471.59) v1(-2678.81,-3471.59) ; C19.1@-3359.87,-1822.59 -3329.81,-1822.59 ; C19.1@-3340.67,-1830.03 cw(c-3329.81,-1834.24) -3329.81,-1822.59 ; C19.1@-3340.67,-1815.15 ccw(c-3329.81,-1810.94) -3329.81,-1822.59 ; D4.2@-3339.24,-1725.26 cw(c-3384.47,-1770.49) -3320.5,-1770.49 cw(c-3256.54,-1770.49) D4.2@-3301.77,-1725.26 ; D4.2@-3337.68,-1678.48 ccw(c-3369.36,-1641.29) -3320.5,-1641.29 ccw(c-3271.65,-1641.29) D4.2@-3303.32,-1678.48 ; D4.2@-3332.17,-1718.19 cw(c-3360.33,-1746.35) -3320.5,-1746.35 cw(c-3280.68,-1746.35) D4.2@-3308.84,-1718.19 ; D4.2@-3331.2,-1686.09 ccw(c-3350.92,-1662.94) -3320.5,-1662.94 ccw(c-3290.09,-1662.94) D4.2@-3309.81,-1686.09 ; U8.3@-3293.03,-1249.1 cw(c-3316.63,-1272.7) -3283.26,-1272.7 ; U8.3@-3293.03,-1207.83 ccw(c-3321.46,-1179.4) -3281.26,-1179.4 ccw(c-3241.05,-1179.4) U8.3@-3269.48,-1207.83 ; v1@-3284.68,-1102.46 cw(c-3292.95,-1110.73) -3281.26,-1110.73 cw(c-3269.57,-1110.73) v1@-3277.83,-1102.46 ; -3283.26,-1282.36 cw(c-3236.22,-1282.36) U8.3@-3269.48,-1249.1 ; v1(-3281.26,-1099.04) U8.3@-3281.26,-1228.46 -3283.26,-1230.46 -3283.26,-1604.04 -3320.5,-1641.28 D4.2@-3320.5,-1702.59 -3320.5,-1813.28 -3329.81,-1822.59 ; -3155.72,-3455.07 ccw(c-3137.2,-3455.07) -3150.3,-3468.17 ccw(c-3142.03,-3459.9) -3142.03,-3471.59 ccw(c-3142.03,-3483.28) v1@-3150.3,-3475.01 ; v1@-2682.23,-3475.01 ccw(c-2690.5,-3483.28) -2690.5,-3471.59 ccw(c-2690.5,-3459.9) v1@-2682.23,-3468.17 ; LCD.1@-1709.49,-4048.54 ccw(c-1719.1,-4038.93) -1705.51,-4038.93 ccw(c-1691.92,-4038.93) LCD.1@-1701.53,-4048.54 ; v1@-1708.94,-4004.72 cw(c-1717.2,-4012.98) -1705.51,-4012.98 cw(c-1693.82,-4012.98) v1@-1702.09,-4004.72 ; LCD.1@-1705.51,-4075.36 v1(-1705.51,-4001.29)
  Bottom Layer w10: v1@-4647.7,-1666.01 cw(c-4655.97,-1674.28) -4644.27,-1674.28 cw(c-4632.58,-1674.28) v1@-4640.85,-1666.01 ; v1(-4644.27,-1662.59) -4644.27,-1793.73 -4629,-1809 v1(-3903.81,-1809) -3903.81,-1117.59 -3885.26,-1099.04 v1(-3281.26,-1099.04) -3281.26,-486.14 -3297.82,-469.58 v1(-3933.82,-469.58) ; v1@-4079.23,-2079.01 cw(c-4087.5,-2087.28) -4075.81,-2087.28 cw(c-4064.12,-2087.28) v1@-4072.39,-2079.01 ; v1(-4075.81,-2075.59) -4075.81,-3616.59 -4058.81,-3633.59 -3800.81,-3633.59 -3777.81,-3610.59 -3777.81,-3404.81 -3766,-3393 -3167,-3393 -3153.72,-3406.28 v1(-3153.72,-3471.59) ; v1@-3930.39,-473.01 cw(c-3922.13,-481.27) -3922.13,-469.58 cw(c-3922.13,-457.89) v1@-3930.39,-466.16 ; v1@-3907.23,-1812.42 ccw(c-3915.5,-1820.69) -3915.5,-1809 ccw(c-3915.5,-1797.31) -3907.23,-1805.58 ccw(c-3915.5,-1797.31) -3903.81,-1797.31 ccw(c-3892.12,-1797.31) v1@-3900.39,-1805.58 ; v1@-3284.68,-1102.46 ccw(c-3292.95,-1110.73) -3292.95,-1099.04 ccw(c-3292.95,-1087.35) -3284.68,-1095.61 ccw(c-3292.95,-1087.35) -3281.26,-1087.35 ccw(c-3269.57,-1087.35) v1@-3277.83,-1095.61 ; v1@-3157.15,-3468.17 ccw(c-3165.41,-3459.9) -3153.72,-3459.9 ccw(c-3142.03,-3459.9) v1@-3150.3,-3468.17 ; v1@-2682.23,-3475.01 cw(c-2690.5,-3483.28) -2678.81,-3483.28 cw(c-2667.12,-3483.28) v1@-2675.39,-3475.01 ; v1(-2678.81,-3471.59) -2678.81,-3490.59 -2672.81,-3496.59 -1725.81,-3496.59 -1705.51,-3516.89 v1(-1705.51,-4001.29) ; v1@-1708.94,-3997.87 ccw(c-1717.2,-3989.6) -1705.51,-3989.6 ccw(c-1693.82,-3989.6) v1@-1702.09,-3997.87
7V: C37.1 C41.1 C43.1 C44.1 R39.2 R48.2 R54.2 U9.8 U10.4 | length 5146.1
  Top Layer w10: C43.1@-2957.63,-1065.97 ccw(c-2982.7,-1091.04) -2982.7,-1055.59 ccw(c-2982.7,-1020.14) C43.1@-2957.63,-1045.21 ; R54.2@-2957.63,-845.97 ccw(c-2982.7,-871.04) -2982.7,-835.59 ccw(c-2982.7,-800.14) R54.2@-2957.63,-825.21 ; C44.1@-2955.66,-1165.21 ccw(c-2980.73,-1140.14) -2945.27,-1140.14 ccw(c-2909.82,-1140.14) C44.1@-2934.89,-1165.21 ; C43.1@-2955.66,-1065.97 cw(c-2980.73,-1091.04) -2945.27,-1091.04 cw(c-2909.82,-1091.04) C43.1@-2934.89,-1065.97 ; R54.2@-2955.66,-825.21 ccw(c-2980.73,-800.14) -2945.27,-800.14 ccw(c-2909.82,-800.14) R54.2@-2934.89,-825.21 ; C44.1@-2945.27,-1175.59 C43.1@-2945.27,-1055.59 -3002.81,-1055.59 -3014.81,-1043.59 -3014.81,-847.59 -3002.81,-835.59 R54.2@-2945.27,-835.59 -2945.27,-762.05 -2920.81,-737.59 -2629.81,-737.59 -2611.81,-755.59 ; U10.4@-2684.83,-966.88 cw(c-2861.12,-1143.17) -2611.81,-1143.17 cw(c-2362.5,-1143.17) U10.4@-2538.79,-966.88 ; U10.4@-2677.76,-959.81 cw(c-2836.98,-1119.03) -2611.81,-1119.03 cw(c-2386.64,-1119.03) U10.4@-2545.86,-959.81 ; U10.4@-2670.69,-952.74 cw(c-2812.84,-1094.88) -2611.81,-1094.88 cw(c-2410.78,-1094.88) U10.4@-2552.93,-952.74 ; U10.4@-2663.62,-945.67 cw(c-2788.69,-1070.74) -2611.81,-1070.74 cw(c-2434.93,-1070.74) U10.4@-2560,-945.67 ; U10.4@-2656.55,-938.59 cw(c-2764.55,-1046.6) -2611.81,-1046.6 cw(c-2459.07,-1046.6) U10.4@-2567.07,-938.59 ; U10.4@-2649.48,-931.52 cw(c-2740.41,-1022.46) -2611.81,-1022.46 cw(c-2483.21,-1022.46) U10.4@-2574.14,-931.52 ; U10.4@-2635.47,-785.46 ccw(c-2642.49,-755.59) -2611.81,-755.59 ; U10.4@-2633.17,-795.2 ccw(c-2639.52,-768.22) -2611.81,-768.22 ccw(c-2584.1,-768.22) U10.4@-2590.45,-795.2 ; U10.4@-2588.15,-785.46 cw(c-2581.13,-755.59) -2611.81,-755.59 ; U9.8@-2533.63,-1425.41 ccw(c-2545.26,-1437.03) -2545.26,-1420.59 ccw(c-2545.26,-1404.15) U9.8@-2533.63,-1415.77 ; U9.8@-2502.14,-1415.77 ccw(c-2513.76,-1404.15) -2497.32,-1404.15 ccw(c-2480.88,-1404.15) U9.8@-2492.51,-1415.77 ; C41.1@-2217.63,-1325.97 ccw(c-2242.7,-1351.04) -2242.7,-1315.59 ccw(c-2242.7,-1280.14) C41.1@-2217.63,-1305.21 ; C37.1@-2215.66,-1425.21 ccw(c-2240.73,-1400.14) -2205.27,-1400.14 ccw(c-2169.82,-1400.14) C37.1@-2194.89,-1425.21 ; C41.1@-2215.66,-1325.97 cw(c-2240.73,-1351.04) -2205.27,-1351.04 cw(c-2169.82,-1351.04) C41.1@-2194.89,-1325.97 ; v1@-2208.7,-1378.01 cw(c-2216.97,-1386.28) -2205.27,-1386.28 cw(c-2193.58,-1386.28) v1@-2201.85,-1378.01 ; v1@-2208.7,-1371.17 ccw(c-2216.97,-1362.9) -2205.27,-1362.9 ccw(c-2193.58,-1362.9) v1@-2201.85,-1371.17 ; C37.1@-2205.27,-1435.59 C41.1@-2205.27,-1315.59 -2481.81,-1315.59 -2497.32,-1331.1 U9.8@-2497.32,-1420.59 -2599.81,-1420.59 -2611.81,-1408.59 U10.4@-2611.81,-889.92 -2611.81,-755.59 ; R48.2@-2015.66,-1425.21 ccw(c-2040.73,-1400.14) -2005.27,-1400.14 ccw(c-1969.82,-1400.14) R48.2@-1994.89,-1425.21 ; R39.2@-2015.66,-1325.97 cw(c-2040.73,-1351.04) -2005.27,-1351.04 cw(c-1969.82,-1351.04) R39.2@-1994.89,-1325.97 ; v1@-2008.7,-1378.01 cw(c-2016.97,-1386.28) -2005.27,-1386.28 cw(c-1993.58,-1386.28) v1@-2001.85,-1378.01 ; v1@-2008.7,-1371.17 ccw(c-2016.97,-1362.9) -2005.27,-1362.9 ccw(c-1993.58,-1362.9) v1@-2001.85,-1371.17 ; R48.2@-2005.27,-1435.59 v1(-2005.27,-1374.59) R39.2@-2005.27,-1315.59
  Bottom Layer w10: v1(-2205.27,-1374.59) v1(-2005.27,-1374.59) ; v1@-2201.85,-1378.01 cw(c-2193.58,-1386.28) -2193.58,-1374.59 cw(c-2193.58,-1362.9) v1@-2201.85,-1371.17 ; v1@-2008.7,-1378.01 ccw(c-2016.97,-1386.28) -2016.97,-1374.59 ccw(c-2016.97,-1362.9) v1@-2008.7,-1371.17
9V: C15.1 F1.2 R14.2 R15.2 U7.2 U10.3 U11.3 | length 5281.2
  Top Layer w10: C15.1@-4633.41,-928.59 C15.1@-4620.01,-928.59 v1(-4344.27,-928.59) R14.2@-4344.27,-988.59 R15.2@-4344.27,-1108.59 ; F1.2@-4605.81,-1108.59 R15.2@-4344.27,-1108.59 ; C15.1@-4605.45,-943.15 cw(c-4570.3,-978.3) -4570.3,-928.59 cw(c-4570.3,-878.88) C15.1@-4605.45,-914.03 ; F1.2@-4590.96,-1123.44 cw(c-4555.11,-1159.29) -4555.11,-1108.59 cw(c-4555.11,-1057.89) F1.2@-4590.96,-1093.74 ; F1.2@-4583.89,-1130.51 cw(c-4530.97,-1183.43) -4530.97,-1108.59 cw(c-4530.97,-1033.75) F1.2@-4583.89,-1086.67 ; R15.2@-4356.63,-1118.97 ccw(c-4381.7,-1144.04) -4381.7,-1108.59 ccw(c-4381.7,-1073.14) R15.2@-4356.63,-1098.21 ; R15.2@-4354.66,-1118.97 cw(c-4379.73,-1144.04) -4344.27,-1144.04 cw(c-4308.82,-1144.04) R15.2@-4333.89,-1118.97 ; R15.2@-4354.66,-1098.21 ccw(c-4379.73,-1073.14) -4344.27,-1073.14 ccw(c-4308.82,-1073.14) R15.2@-4333.89,-1098.21 ; R14.2@-4354.66,-998.97 cw(c-4379.73,-1024.04) -4344.27,-1024.04 cw(c-4308.82,-1024.04) R14.2@-4333.89,-998.97 ; R14.2@-4354.66,-978.21 ccw(c-4379.73,-953.14) -4344.27,-953.14 ccw(c-4308.82,-953.14) R14.2@-4333.89,-978.21 ; v1@-4347.7,-925.17 cw(c-4355.97,-916.9) -4355.97,-928.59 cw(c-4355.97,-940.28) -4347.7,-932.01 cw(c-4355.97,-940.28) -4344.27,-940.28 cw(c-4332.58,-940.28) v1@-4340.85,-932.01 ; U7.2@-4217.11,-1412.01 -4149.82,-1412.01 -4135.81,-1398 -4135.81,-1269.59 -4146.81,-1258.59 -4327.81,-1258.59 -4344.27,-1242.13 R15.2@-4344.27,-1108.59 ; U7.2@-4184.16,-1416.96 cw(c-4172.21,-1428.91) -4172.21,-1412.01 cw(c-4172.21,-1395.11) U7.2@-4184.16,-1407.06 ; v1(-3725.81,-681.59) -2483.81,-681.59 -2445.81,-719.59 -2445.81,-1166.59 -2460.48,-1181.26 U10.3@-2521.85,-1181.26 -2521.85,-1243.55 -2511.81,-1253.59 -2192.81,-1253.59 -2181.85,-1242.63 U11.3@-2181.85,-1181.26 ; v1@-3722.39,-685.01 cw(c-3714.12,-693.28) -3714.12,-681.59 cw(c-3714.12,-669.9) v1@-3722.39,-678.17 ; U10.3@-2532.23,-1203.45 cw(c-2557.3,-1228.52) -2521.85,-1228.52 cw(c-2486.4,-1228.52) U10.3@-2511.47,-1203.45 ; U10.3@-2511.47,-1191.64 cw(c-2486.4,-1216.71) -2486.4,-1181.26 cw(c-2486.4,-1145.81) U10.3@-2511.47,-1170.88 ; U11.3@-2192.23,-1203.45 cw(c-2217.3,-1228.52) -2181.85,-1228.52 cw(c-2146.4,-1228.52) U11.3@-2171.47,-1203.45
  Bottom Layer w10: v1@-4347.7,-925.17 ccw(c-4355.97,-916.9) -4344.27,-916.9 ccw(c-4332.58,-916.9) v1@-4340.85,-925.17 ; v1(-4344.27,-928.59) -4344.27,-716.05 -4309.81,-681.59 v1(-3725.81,-681.59) ; v1@-3729.23,-685.01 ccw(c-3737.5,-693.28) -3737.5,-681.59 ccw(c-3737.5,-669.9) v1@-3729.23,-678.17
AVDD: C39.1 MODIF.1 R45.1 R46.1 R47.2 | length 5541
  Top Layer w6: R46.1@-3057.07,-1927.39 cw(c-3085.56,-1955.87) -3045.27,-1955.87 cw(c-3004.99,-1955.87) R46.1@-3033.48,-1927.39 ; R46.1@-3052.83,-1923.15 cw(c-3071.07,-1941.39) -3045.27,-1941.39 cw(c-3019.48,-1941.39) R46.1@-3037.72,-1923.15 ; R46.1@-3045.27,-1915.59 -3045.27,-2008.13 -3017.81,-2035.59 C39.1@-2565.27,-2035.59 R45.1@-2565.27,-1915.59 R47.2@-2565.27,-1795.59 -2565.27,-1751.05 -2549.81,-1735.59 -1681.81,-1735.59 -1665.81,-1751.59 -1665.81,-1902.59 -1646.81,-1921.59 v1(-1533.81,-1921.59) ; C39.1@-2579.04,-2047.39 ccw(c-2607.52,-2075.87) -2607.52,-2035.59 ccw(c-2607.52,-1995.31) C39.1@-2579.04,-2023.79 ; C39.1@-2577.07,-2023.79 ccw(c-2605.56,-1995.31) -2565.27,-1995.31 ccw(c-2524.99,-1995.31) C39.1@-2553.48,-2023.79 ; R45.1@-2577.07,-1927.39 cw(c-2605.56,-1955.87) -2565.27,-1955.87 cw(c-2524.99,-1955.87) R45.1@-2553.48,-1927.39 ; R45.1@-2577.07,-1903.79 ccw(c-2605.56,-1875.31) -2565.27,-1875.31 ccw(c-2524.99,-1875.31) R45.1@-2553.48,-1903.79 ; R47.2@-2577.07,-1807.39 cw(c-2605.56,-1835.87) -2565.27,-1835.87 cw(c-2524.99,-1835.87) R47.2@-2553.48,-1807.39 ; R47.2@-2577.07,-1783.79 ccw(c-2605.56,-1755.31) -2565.27,-1755.31 ccw(c-2524.99,-1755.31) R47.2@-2553.48,-1783.79 ; C39.1@-2574.8,-2043.15 ccw(c-2593.04,-2061.39) -2593.04,-2035.59 ccw(c-2593.04,-2009.79) C39.1@-2574.8,-2028.03 ; C39.1@-2572.83,-2028.03 ccw(c-2591.07,-2009.79) -2565.27,-2009.79 ccw(c-2539.48,-2009.79) C39.1@-2557.72,-2028.03 ; R45.1@-2572.83,-1923.15 cw(c-2591.07,-1941.39) -2565.27,-1941.39 cw(c-2539.48,-1941.39) R45.1@-2557.72,-1923.15 ; R45.1@-2572.83,-1908.03 ccw(c-2591.07,-1889.79) -2565.27,-1889.79 ccw(c-2539.48,-1889.79) R45.1@-2557.72,-1908.03 ; R47.2@-2572.83,-1803.15 cw(c-2591.07,-1821.39) -2565.27,-1821.39 cw(c-2539.48,-1821.39) R47.2@-2557.72,-1803.15 ; R47.2@-2572.83,-1788.03 ccw(c-2591.07,-1769.79) -2565.27,-1769.79 ccw(c-2539.48,-1769.79) R47.2@-2557.72,-1788.03 ; v1@-1538.65,-1926.43 ccw(c-1550.33,-1938.11) -1550.33,-1921.59 ccw(c-1550.33,-1905.07) v1@-1538.65,-1916.75 ; v1@-1145.65,-3436.43 cw(c-1157.33,-3448.11) -1140.81,-3448.11 cw(c-1124.29,-3448.11) v1@-1135.97,-3436.43 ; v1(-1140.81,-3431.59) -1140.81,-3763.59 -1119.81,-3784.59 MODIF.1@-777.58,-3784.59 ; MODIF.1@-833.67,-3793.05 ccw(c-854.09,-3813.47) -854.09,-3784.59 ccw(c-854.09,-3755.71) MODIF.1@-833.67,-3776.13
  Bottom Layer w6: v1@-1538.65,-1926.43 cw(c-1550.33,-1938.11) -1533.81,-1938.11 cw(c-1517.29,-1938.11) v1@-1528.97,-1926.43 ; v1(-1533.81,-1921.59) -1533.81,-3408.59 -1510.81,-3431.59 v1(-1140.81,-3431.59) ; v1@-1145.65,-3436.43 ccw(c-1157.33,-3448.11) -1157.33,-3431.59 ccw(c-1157.33,-3415.07) v1@-1145.65,-3426.75
AVDD_IN: R42.2 R46.2 R51.2 | length 837.9
  Top Layer w6: R42.2@-3057.07,-1807.39 cw(c-3085.56,-1835.87) -3045.27,-1835.87 cw(c-3004.99,-1835.87) R42.2@-3033.48,-1807.39 ; R42.2@-3052.83,-1803.15 cw(c-3071.07,-1821.39) -3045.27,-1821.39 cw(c-3019.48,-1821.39) R42.2@-3037.72,-1803.15 ; R42.2@-3045.27,-1795.59 -3045.27,-1849.13 -3035.81,-1858.59 -2986.81,-1858.59 -2978.35,-1867.05 R46.2@-2978.35,-1915.59 -2856.81,-1915.59 -2845.27,-1904.05 R51.2@-2845.27,-1795.59 ; R46.2@-2990.14,-1903.79 ccw(c-3018.63,-1875.31) -2978.35,-1875.31 ccw(c-2938.06,-1875.31) R46.2@-2966.55,-1903.79 ; R46.2@-2985.9,-1908.03 ccw(c-3004.14,-1889.79) -2978.35,-1889.79 ccw(c-2952.55,-1889.79) R46.2@-2970.79,-1908.03 ; R46.2@-2968.82,-1923.15 cw(c-2950.58,-1941.39) -2950.58,-1915.59 cw(c-2950.58,-1889.79) R46.2@-2968.82,-1908.03 ; R46.2@-2964.58,-1927.39 cw(c-2936.1,-1955.87) -2936.1,-1915.59 cw(c-2936.1,-1875.31) R46.2@-2964.58,-1903.79 ; R51.2@-2857.07,-1807.39 cw(c-2885.56,-1835.87) -2845.27,-1835.87 cw(c-2804.99,-1835.87) R51.2@-2833.48,-1807.39 ; R51.2@-2852.83,-1803.15 cw(c-2871.07,-1821.39) -2845.27,-1821.39 cw(c-2819.48,-1821.39) R51.2@-2837.72,-1803.15
BOOT_MODE: Boot_sel.2 U1.43 | length 4646.5
  Top Layer w6: U1.43@-3415.31,-3316.22 -3148.09,-3316.22 -3076.85,-3387.46 -1247.94,-3387.46 -1234.81,-3400.59 v1(-1234.81,-3872.59) ; v1@-1239.65,-3867.75 ccw(c-1251.33,-3856.07) -1234.81,-3856.07 ccw(c-1218.29,-3856.07) v1@-1229.97,-3867.75 ; v1(-765,-4438.16) Boot_sel.2@-503.25,-4438.16 Boot_sel.2@-280.81,-4438.16 ; v1@-760.16,-4443 cw(c-748.48,-4454.68) -748.48,-4438.16 cw(c-748.48,-4421.64) v1@-760.16,-4433.33 ; Boot_sel.2@-533.17,-4451.35 ccw(c-565.02,-4483.2) -565.02,-4438.16 ccw(c-565.02,-4393.13) Boot_sel.2@-533.17,-4424.97 ; Boot_sel.2@-528.93,-4447.11 ccw(c-550.53,-4468.71) -550.53,-4438.16 ccw(c-550.53,-4407.62) Boot_sel.2@-528.93,-4429.22 ; Boot_sel.2@-477.57,-4447.11 cw(c-455.97,-4468.71) -455.97,-4438.16 cw(c-455.97,-4407.62) Boot_sel.2@-477.57,-4429.22 ; Boot_sel.2@-473.33,-4451.35 cw(c-441.48,-4483.2) -441.48,-4438.16 cw(c-441.48,-4393.13) Boot_sel.2@-473.33,-4424.97 ; Boot_sel.2@-310.73,-4451.35 ccw(c-342.58,-4483.2) -342.58,-4438.16 ccw(c-342.58,-4393.13) Boot_sel.2@-310.73,-4424.97 ; Boot_sel.2@-306.49,-4447.11 ccw(c-328.09,-4468.71) -328.09,-4438.16 ccw(c-328.09,-4407.62) Boot_sel.2@-306.49,-4429.22
  Bottom Layer w6: v1(-1234.81,-3872.59) -842.81,-3872.59 -825.81,-3889.59 -825.81,-4420.19 -807.84,-4438.16 v1(-765,-4438.16) ; v1@-1229.97,-3877.43 cw(c-1218.29,-3889.11) -1218.29,-3872.59 cw(c-1218.29,-3856.07) v1@-1229.97,-3867.75 ; v1@-769.84,-4443 ccw(c-781.52,-4454.68) -781.52,-4438.16 ccw(c-781.52,-4421.64) v1@-769.84,-4433.33
BOOT_USB_DM: J2.2 U1.31 | length 5229.8
  Top Layer w6: J2.2@-3843.02,-623.45 cw(c-3861.42,-641.85) -3835.39,-641.85 cw(c-3809.37,-641.85) J2.2@-3827.77,-623.45 ; J2.2@-3835.39,-570.55 -3835.39,-871.01 -3822.81,-883.59 -3121.81,-883.59 -3100.81,-904.59 v1(-3100.81,-1244.59) ; U1.31@-3469.45,-3512.09 -3469.45,-3542.95 -3460.81,-3551.59 v1(-3304.81,-3551.59) ; v1@-3309.65,-3556.43 ccw(c-3321.33,-3568.11) -3321.33,-3551.59 ccw(c-3321.33,-3535.07) v1@-3309.65,-3546.75 ; v1@-3240.65,-2696.43 cw(c-3252.33,-2708.11) -3235.81,-2708.11 cw(c-3219.29,-2708.11) v1@-3230.97,-2696.43 ; v1(-3235.81,-2691.59) -3235.81,-2788.59 -3220.81,-2803.59 v1(-3117.81,-2803.59) ; v1@-3122.65,-2808.43 ccw(c-3134.33,-2820.11) -3134.33,-2803.59 ccw(c-3134.33,-2787.07) v1@-3122.65,-2798.75 ; v1@-3105.65,-1239.75 ccw(c-3117.33,-1228.07) -3100.81,-1228.07 ccw(c-3084.29,-1228.07) v1@-3095.97,-1239.75 ; v1@-2832.65,-3231.75 ccw(c-2844.33,-3220.07) -2827.81,-3220.07 ccw(c-2811.29,-3220.07) v1@-2822.97,-3231.75 ; v1@-2832.65,-2808.43 cw(c-2844.33,-2820.11) -2827.81,-2820.11 cw(c-2811.29,-2820.11) v1@-2822.97,-2808.43 ; v1(-2827.81,-3236.59) v1(-2827.81,-2803.59)
  Bottom Layer w6: v1(-3304.81,-3551.59) -2841.81,-3551.59 -2827.81,-3537.59 v1(-2827.81,-3236.59) ; v1@-3299.97,-3556.43 cw(c-3288.29,-3568.11) -3288.29,-3551.59 cw(c-3288.29,-3535.07) v1@-3299.97,-3546.75 ; v1@-3240.65,-2686.75 ccw(c-3252.33,-2675.07) -3235.81,-2675.07 ccw(c-3219.29,-2675.07) v1@-3230.97,-2686.75 ; v1(-3235.81,-2691.59) -3235.81,-1412.59 -3217.81,-1394.59 -3117.81,-1394.59 -3100.81,-1377.59 v1(-3100.81,-1244.59) ; v1(-3117.81,-2803.59) v1(-2827.81,-2803.59) ; v1@-3112.97,-2808.43 cw(c-3101.29,-2820.11) -3101.29,-2803.59 cw(c-3101.29,-2787.07) v1@-3112.97,-2798.75 ; v1@-3105.65,-1249.43 cw(c-3117.33,-1261.11) -3100.81,-1261.11 cw(c-3084.29,-1261.11) v1@-3095.97,-1249.43 ; v1@-2832.65,-3241.43 cw(c-2844.33,-3253.11) -2827.81,-3253.11 cw(c-2811.29,-3253.11) v1@-2822.97,-3241.43 ; v1@-2832.65,-2808.43 ccw(c-2844.33,-2820.11) -2844.33,-2803.59 ccw(c-2844.33,-2787.07) v1@-2832.65,-2798.75
BOOT_USB_DP: J2.3 U1.32 | length 5196.9
  Top Layer w6: J2.3@-3793.8,-623.45 cw(c-3812.21,-641.85) -3786.18,-641.85 cw(c-3760.16,-641.85) J2.3@-3778.56,-623.45 ; J2.3@-3786.18,-570.55 -3786.18,-845.22 -3776.81,-854.59 -3063.81,-854.59 -3048.81,-869.59 v1(-3048.81,-1215.59) ; U1.32@-3453.7,-3512.09 v1(-3299.31,-3512.09) ; v1@-3304.15,-3516.92 ccw(c-3315.83,-3528.61) -3315.83,-3512.09 ccw(c-3315.83,-3495.57) v1@-3304.15,-3507.25 ; v1(-3263.31,-2908.09) v1(-3136.81,-2908.09) ; v1@-3258.48,-2912.92 cw(c-3246.79,-2924.61) -3246.79,-2908.09 cw(c-3246.79,-2891.57) v1@-3258.48,-2903.25 ; v1@-3141.65,-2912.92 ccw(c-3153.33,-2924.61) -3153.33,-2908.09 ccw(c-3153.33,-2891.57) v1@-3141.65,-2903.25 ; v1@-3053.65,-1210.75 ccw(c-3065.33,-1199.07) -3048.81,-1199.07 ccw(c-3032.29,-1199.07) v1@-3043.97,-1210.75 ; v1@-2868.14,-3230.26 ccw(c-2879.83,-3218.57) -2863.31,-3218.57 ccw(c-2846.79,-3218.57) v1@-2858.47,-3230.26 ; v1@-2868.14,-2912.92 cw(c-2879.83,-2924.61) -2863.31,-2924.61 cw(c-2846.79,-2924.61) v1@-2858.47,-2912.92 ; v1(-2863.31,-3235.09) v1(-2863.31,-2908.09)
  Bottom Layer w6: v1(-3299.31,-3512.09) -2874.31,-3512.09 -2863.31,-3501.09 v1(-2863.31,-3235.09) ; v1@-3294.48,-3516.92 cw(c-3282.79,-3528.61) -3282.79,-3512.09 cw(c-3282.79,-3495.57) v1@-3294.48,-3507.25 ; v1@-3268.15,-2903.25 ccw(c-3279.83,-2891.57) -3263.31,-2891.57 ccw(c-3246.79,-2891.57) v1@-3258.48,-2903.25 ; v1(-3263.31,-2908.09) -3263.31,-2616.09 -3247.81,-2600.59 -3247.81,-1231.59 -3231.81,-1215.59 v1(-3048.81,-1215.59) ; v1(-3136.81,-2908.09) v1(-2863.31,-2908.09) ; v1@-3131.97,-2912.92 cw(c-3120.29,-2924.61) -3120.29,-2908.09 cw(c-3120.29,-2891.57) v1@-3131.97,-2903.25 ; v1@-3053.65,-1220.43 ccw(c-3065.33,-1232.11) -3065.33,-1215.59 ccw(c-3065.33,-1199.07) v1@-3053.65,-1210.75 ; v1@-2868.14,-3239.93 cw(c-2879.83,-3251.61) -2863.31,-3251.61 cw(c-2846.79,-3251.61) v1@-2858.47,-3239.93 ; v1@-2868.14,-2912.92 ccw(c-2879.83,-2924.61) -2879.83,-2908.09 ccw(c-2879.83,-2891.57) v1@-2868.14,-2903.25
BUZZER: R11.1 U1.55 | length 2513.5
  Top Layer w6: R11.1@-4946.54,-2260 v1(-4893,-2260) ; R11.1@-4937.01,-2267.56 cw(c-4918.77,-2285.8) -4918.77,-2260 cw(c-4918.77,-2234.2) R11.1@-4937.01,-2252.44 ; R11.1@-4932.77,-2271.8 cw(c-4904.29,-2300.28) -4904.29,-2260 cw(c-4904.29,-2219.72) R11.1@-4932.77,-2248.2 ; v1@-4897.84,-2264.84 ccw(c-4909.52,-2276.52) -4909.52,-2260 ccw(c-4909.52,-2243.48) v1@-4897.84,-2255.16 ; v1@-4117.65,-2706.43 cw(c-4129.33,-2718.11) -4112.81,-2718.11 cw(c-4096.29,-2718.11) v1@-4107.97,-2706.43 ; v1(-4112.81,-2701.59) -4112.81,-2764.59 -4095.81,-2781.59 -3561.81,-2781.59 -3548.19,-2795.21 U1.55@-3548.19,-3199.09
  Bottom Layer w6: v1(-4893,-2260) -4136,-2260 -4112.81,-2283.19 -4112.81,-2524 v1(-4112.81,-2701.59) ; v1@-4888.16,-2264.84 cw(c-4876.48,-2276.52) -4876.48,-2260 cw(c-4876.48,-2243.48) v1@-4888.16,-2255.16 ; v1@-4117.65,-2696.75 ccw(c-4129.33,-2685.07) -4112.81,-2685.07 ccw(c-4096.29,-2685.07) v1@-4107.97,-2696.75